# EAGLE board p2c-002-dx (EAGLE 9.1.0)
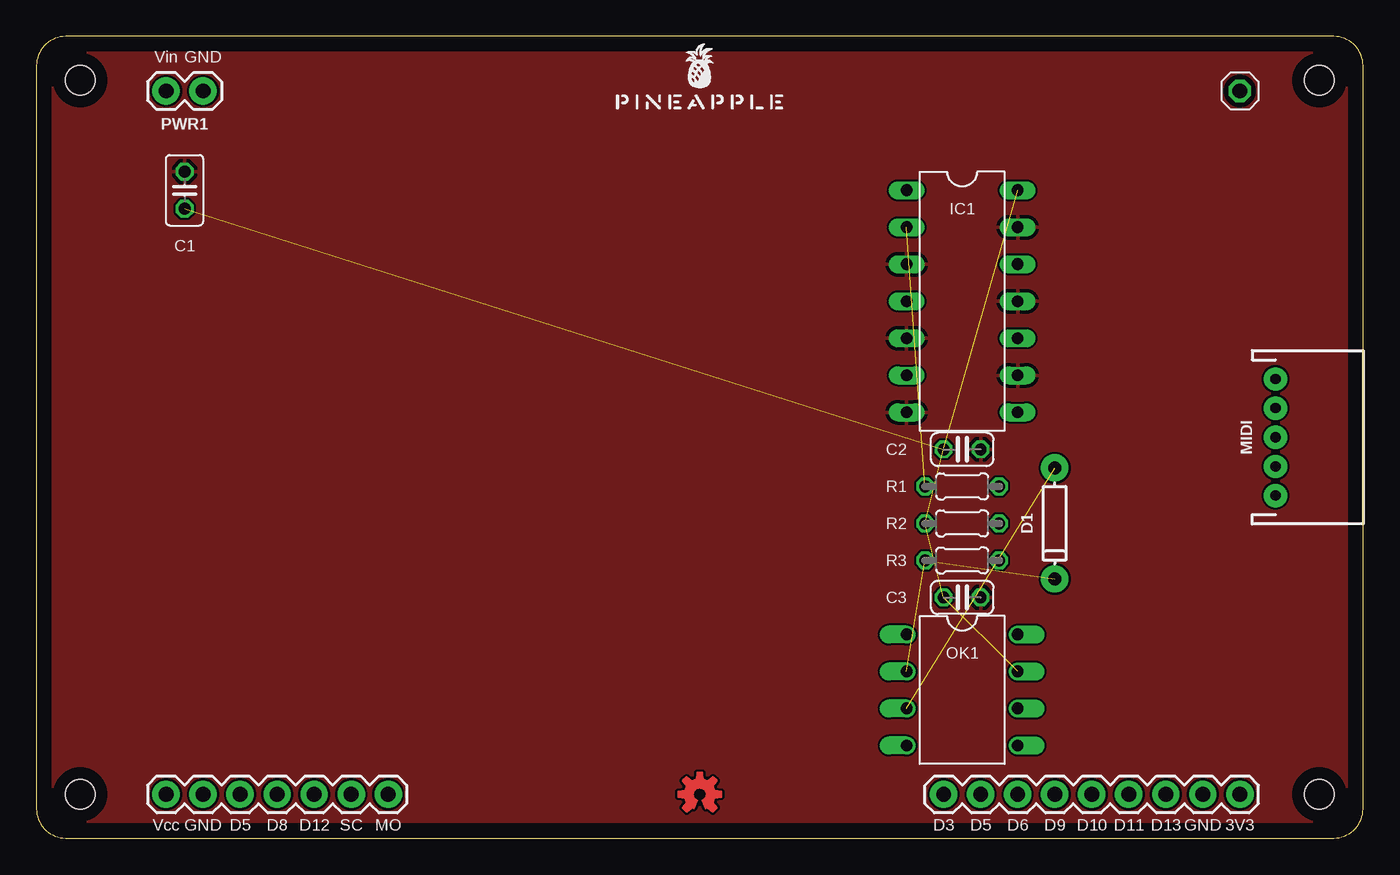
[diagram p0: board, top side]
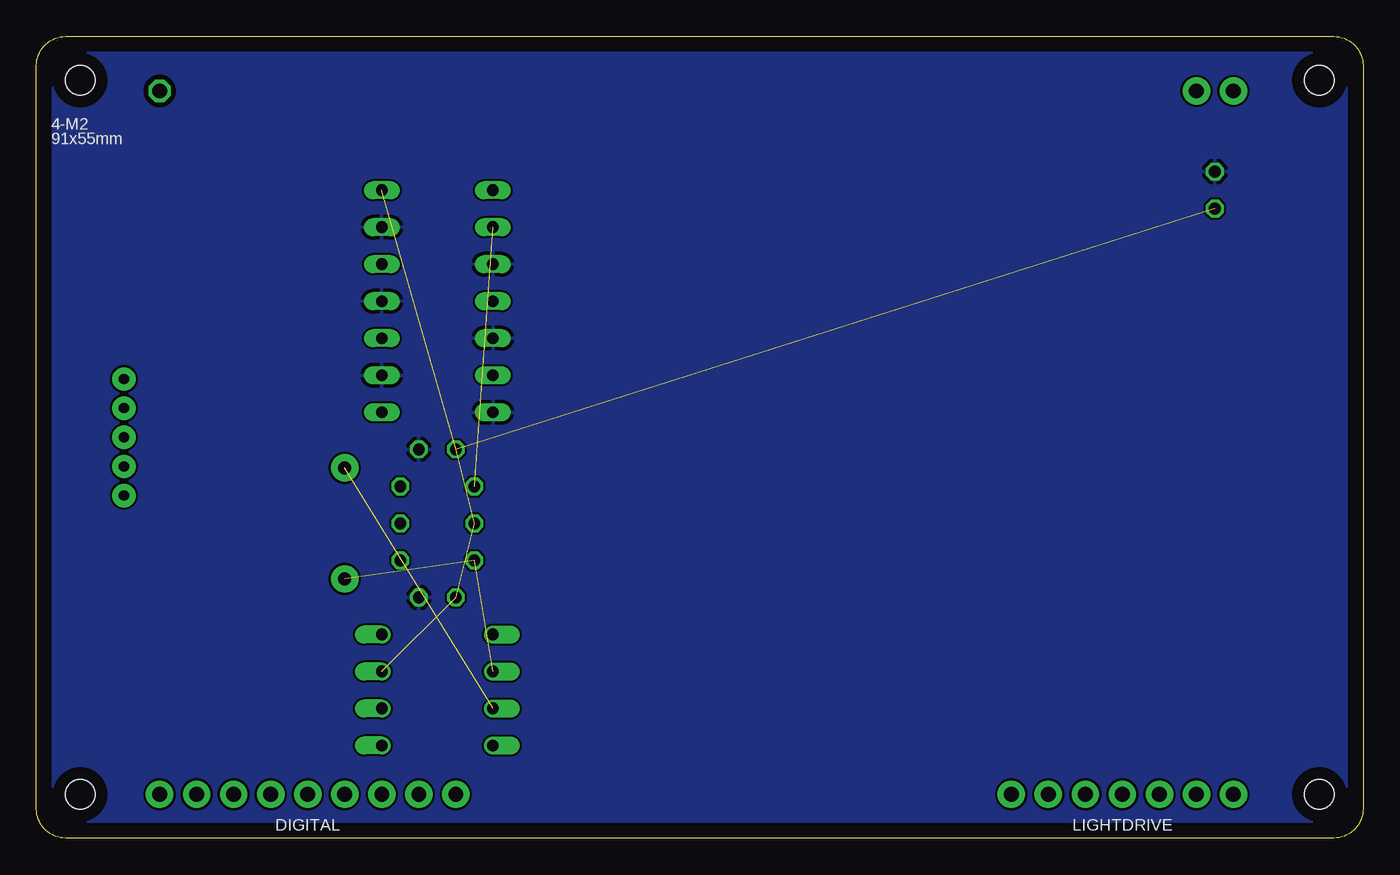
[diagram p1: board, bottom side, seen from below]

Size 91 x 55 mm. Coordinates in mm from the lower left corner, seen from the top.
Outline: 0,53 0,2 arc90 2,0 89,0 arc90 91,2 91,53 arc90 89,55 2,55 arc90 0,53
Copper layers (1*16): Top 0.035mm / dielectric 1.53mm / Bottom 0.035mm
Design rules "pban_5mil-l2": minimum track width 5mil, minimum drill 0.3mm, track to track 5mil, track to pad 0.229mm, pad to pad 5mil, via to via 5mil, smd to smd 5mil, copper to edge 0.5mm, drill to drill 0.5mm, minimum pad ring 0.15mm, minimum via ring 0.15mm, stop-mask expansion 4mil, vias tented up to drill 0.35mm, thermal gap 10mil
Net classes: 0 default: width 0.152 mm, drill 0.305 mm, clearance 0.152 mm
Holes 2 mm at 3,3 3,52 88,52 88,3
tRestrict: area 0,0 to 91,1; area 90,0 to 91,55; area 0,54 to 91,55; area 0,0 to 1,55; area 1.2,50.2 to 4.8,53.8; area 1.2,1.2 to 4.8,4.8; area 86.2,1.2 to 89.8,4.8; area 86.2,50.2 to 89.8,53.8; area 81.5,50.3 to 83.5,52.3
bRestrict: area 0,0 to 91,1; area 90,0 to 91,55; area 0,54 to 91,55; area 0,0 to 1,55; area 86.2,50.2 to 89.8,53.8; area 86.2,1.2 to 89.8,4.8; area 1.2,50.2 to 4.8,53.8; area 1.2,1.2 to 4.8,4.8; area 81.5,50.3 to 83.5,52.3

## Footprints (pad centres in the part's own frame; a part is rotated, then mirrored left to right if it is on the bottom)
C025-025X050 = drill 0.813 octagon: 1 -1.27,0; 2 1.27,0
C025-024X044 = drill 0.813 octagon: 1 -1.27,0; 2 1.27,0
DIODE-1N4148 = drill 0.9 pad 1.88: A -3.81,0; C 3.81,0
1X09 = drill 1.016 pad 1.88: 1 0,0; 2 2.54,0; 3 5.08,0; 4 7.62,0; 5 10.16,0; 6 12.7,0; 7 15.24,0; 8 17.78,0; 9 20.32,0
DIL14 = drill 0.813 long: 1 -7.62,-3.81; 2 -5.08,-3.81; 3 -2.54,-3.81; 4 0,-3.81; 5 2.54,-3.81; 6 5.08,-3.81; 7 7.62,-3.81; 8 7.62,3.81; 9 5.08,3.81; 10 2.54,3.81; 11 0,3.81; 12 -2.54,3.81; 13 -5.08,3.81; 14 -7.62,3.81
1X07 = drill 1.016 pad 1.88: 1 0,0; 2 2.54,0; 3 5.08,0; 4 7.62,0; 5 10.16,0; 6 12.7,0; 7 15.24,0
JST-5-PTH = drill 0.7 pad 1.6: 1 -4,0; 2 -2,0; 3 0,0; 4 2,0; 5 4,0
DIL08 = drill 0.813 offset: 1 -3.81,-3.81; 2 -1.27,-3.81; 3 1.27,-3.81; 4 3.81,-3.81; 5 3.81,3.81; 6 1.27,3.81; 7 -1.27,3.81; 8 -3.81,3.81
1X01 = drill 1.016 octagon: 1 0,0
1X02 = drill 1.016 pad 1.88: 1 0,0; 2 2.54,0
0204/5 = drill 0.813 octagon: 1 -2.54,0; 2 2.54,0

## Placement (x,y rotation side)
C1  0.1u  [C025-025X050]  10.16,44.45 90 top
C2  0.01u  [C025-024X044]  63.5,26.67 0 top
C3  0.01u  [C025-024X044]  63.5,16.51 0 top
D1  [DIODE-1N4148]  69.85,21.59 270 top
DIGITAL  [1X09]  82.55,3 180 top
IC1  74LS07N  [DIL14]  63.5,36.83 270 top
LIGHTDRIVE  [1X07]  8.89,3 0 top
LOGO1  OSHW-LOGOS-COPPER  [OSHW-LOGO-S_COPPER]  45.5,3 0 top
MIDI  [JST-5-PTH]  85,27.5 270 top
OK1  6N137  [DIL08]  63.5,10.16 270 top
POGOPIN  [1X01]  82.55,51.26 0 top
PWR1  [1X02]  8.89,51.26 0 top
R1  220  [0204/5]  63.5,24.13 0 top
R2  220  [0204/5]  63.5,21.59 0 top
R3  220  [0204/5]  63.5,19.05 0 top
U$1  PINEAPPLE450_SILK  [PINEAPPLE450_SILK]  45.5,50 0 top

## Library data of the parts
C1-C3 R1-R3 = resistor
D1 = SparkFun-DiscreteSemi; PROD_ID: DIO-08378
DIGITAL LIGHTDRIVE PWR1 = SparkFun-Connectors
IC1 = 74xx-us
LOGO1 = SparkFun-Aesthetics
MIDI = SparkFun-Connectors; SF_ID: PRT-09917
OK1 = optocoupler; MPN: 6N137; OC_FARNELL: 1328376; OC_NEWARK: 52M1895
POGOPIN = pinhead
U$1 = pineapple

## Nets
GND: C1.2 C2.2 C3.2 IC1.3 IC1.5 IC1.7 IC1.9 IC1.11 IC1.13
MIDIIN+: R3.2
MIDIIN-: D1.A OK1.3
MIDIINA: D1.C OK1.2 R3.1
MIDIOUT+: R2.2
MIDIOUT-: R1.2
MIDIOUTC: IC1.2 R1.1
N$1: IC1.1
VCC: C1.1 C2.1 C3.1 IC1.14 OK1.7 R2.1

## Tracks (layer width: path | path; a pad name or v marks a point on that pad's centre or on a via)
GND
  pour Top: -1,-1 92,-1 92,56 -1,56
  pour Bottom: -2,-2 93,-2 93,57 -2,57
MIDIIN-  (1 unrouted)
MIDIINA  (2 unrouted)
MIDIOUTC  (1 unrouted)
VCC  (5 unrouted)

## Text on the board
tNames: Vin | GND | Vcc | GND | D5 | D8 | D12 | SC | MO | D3 | D5 | D6 | D9 | D10 | D11 | D13 | GND | 3V3
bNames: 4-M2 | 91x55mm | LIGHTDRIVE | DIGITAL